# Altium PCB PCB1.PcbDoc
Units mil, origin at the board's own origin, x right, y up, seen from the top; angles counter-clockwise.
Board outline 5895.03 x 2530.03 mil, 2 copper layers (Top Layer, Bottom Layer); 10 components, 19 nets, 96 pads, 0 vias.
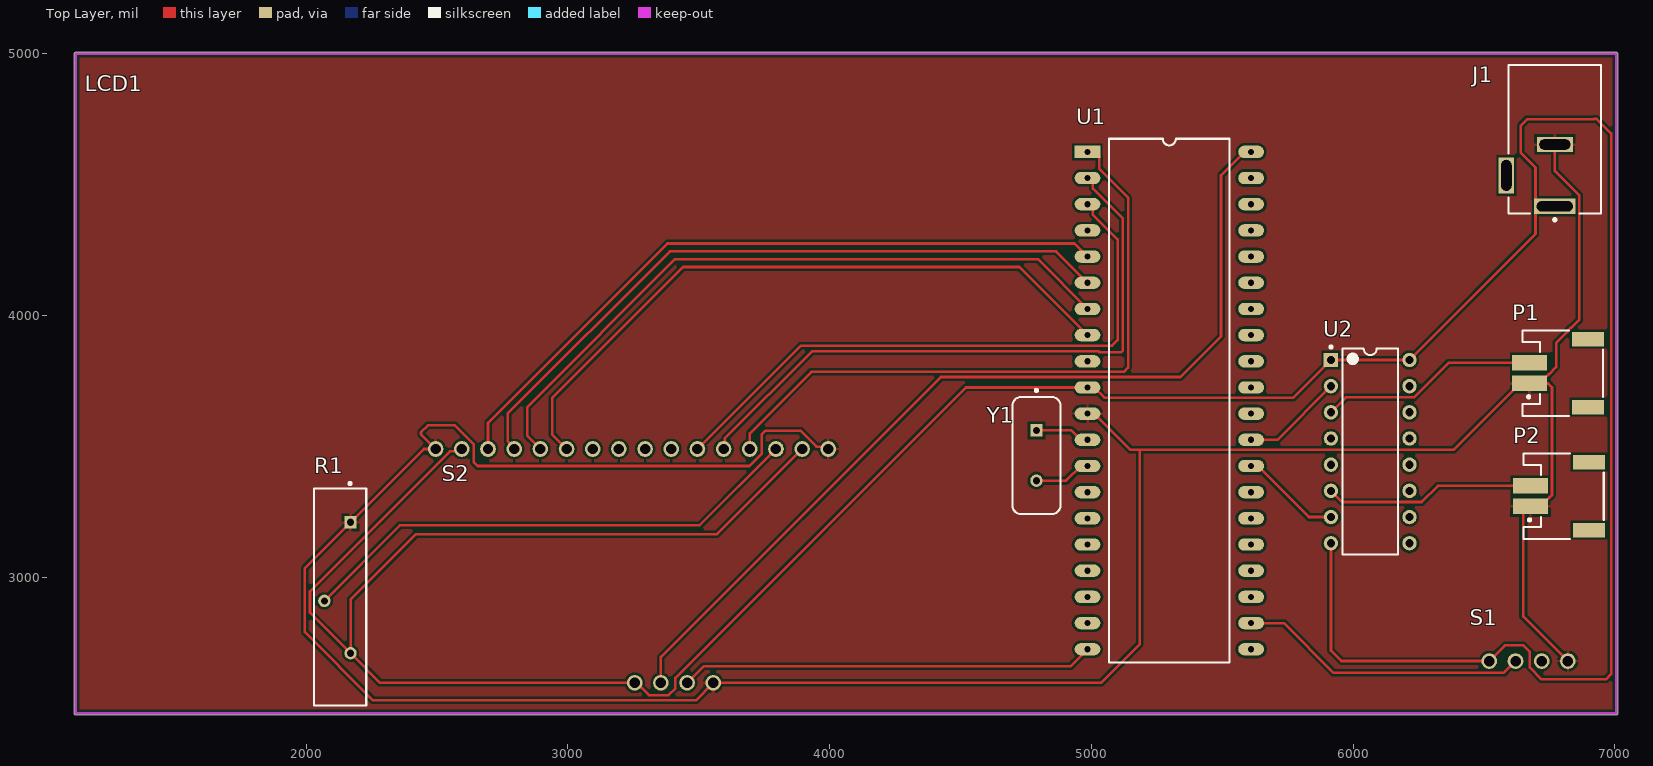
[diagram p0: Top Layer view]
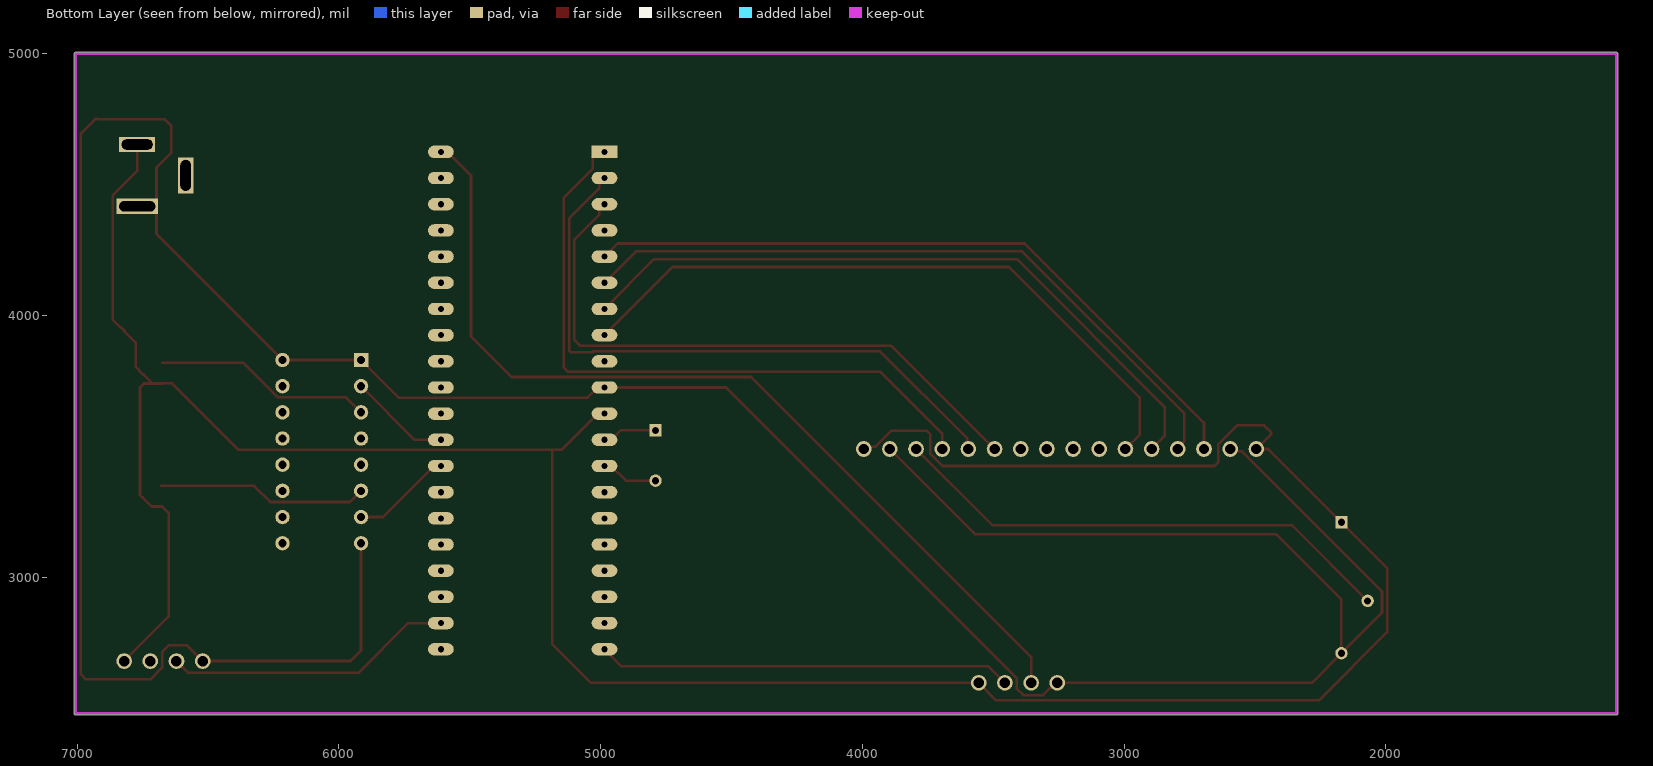
[diagram p1: Bottom Layer view, seen from below]
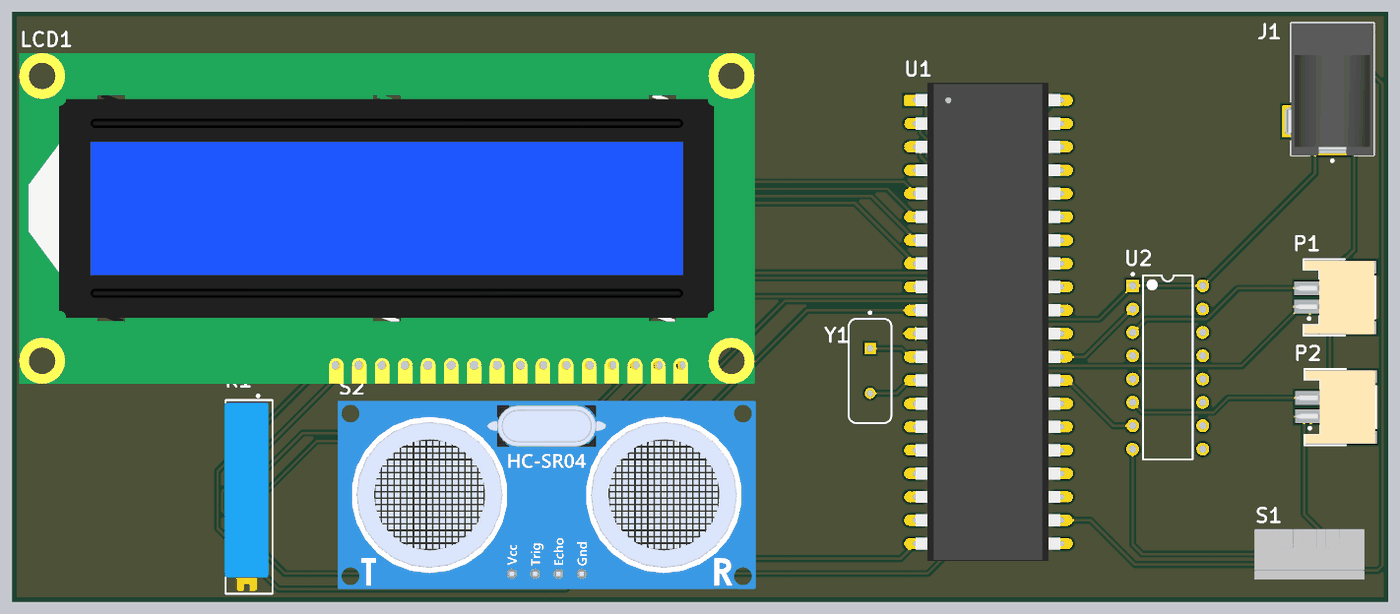
[diagram p2: 3D render of the assembled board from above, using the file's embedded part models]

## Layer stack, top to bottom
Top Solder: solder mask 0.4, Solder Resist, Dk 3.5
Top Layer: signal copper 1.4
Dielectric 1: dielectric 12.6, FR-4, Dk 4.8
Bottom Layer: signal copper 1.4
Bottom Solder: solder mask 0.4, Solder Resist, Dk 3.5

## Board outline
1114.99,2480 1114.98,5000 cw(c1120,5000) 1120,5005.02 7005,5005.02 cw(c7005,5000) 7010.02,5000 7010.02,2480 cw(c7005,2480) 7005,2474.99 1120,2474.99 cw(c1120,2480)

## Design rules (kind name [scope] priority, off if disabled: settings)
Clearance [All] p1: gap=10 ignorepadtopadclearanceinfootprint=FALSE
PolygonConnect [All] p1: connectstyle=Relief reliefconductorwidth=10 reliefentries=4 polygonreliefangle="90 Angle" airgapwidth=10
RoutingVias [All] p1: holewidth=28 width=50 viastyle="Through Hole" minholewidth=28 minwidth=50 maxholewidth=28 maxwidth=50
SolderMaskExpansion [All] p1: expansion=4 istentingtop=FALSE
Width [All] p1: maxlimit=10 minlimit=10 preferedwidth=10
30 further rules are at their usual default settings.

## Classes and differential pairs
component class Sheet2: J1 LCD1 P1 P2 R1 S1 U1 U2 Y1

## Components (designator, comment, footprint, x,y, rotation, side; value= is the part's Value field where it differs from the comment)
J1 "PJ-002A" CUI-PJ-002A_V 6770.04,4535 r90 top
LCD1 "LCD 16*2" LCD1602 2265,3450 r0 top
P1 "620102131822" 620102131822 6800,3780 r90 top
P2 "620102131822" 620102131822 6803.54,3309.92 r90 top
R1 "3006P-1-103LF" FP-3006P-MFG 2130,2925 r270 top
S1 "386" DHT11 6520,2680 r0 top
S2 "HC-SR04" HC-SR04 3255,2705 r0 top
U1 "ATMEGA16A-PU" ATmega16A 4985,4625 r0 top
U2 "L293D" STM-L293D-16 6065,3480 r0 top
Y1 "FOXSLF/080-20" FOX-FOXSLF080-20 4790,3465 r270 top

## Footprints (in the part's own frame and the unit in brackets; to place one, negate y for a bottom-side part, rotate by r counter-clockwise, add the part's x,y. Pads: shape width x height; smd on the part's side, far side on the other; paste and mask are expansions set on the pad)
620102131822 [mm] "2.00mm SMT Male Horizontal Shrouded Header, 2p"
  rect 1.5x3.4 smd: 1(-1,3.2) 2(1,3.2)
  rect 1.4x3.1 smd: MP1(-3.3,-2.45) MP2(3.3,-2.45)
  silkscreen extent -4.15,-3.9 4.15,3.9, body extent -4,-3.8 4,4.8, height 5.57
ATmega16A [mm]
  rect 2.5x1.2 hole 0.6: 1(0,0)
  oval 2.5x1.2 hole 0.6: 2(0,-2.54) 3(0,-5.08) 4(0,-7.62) 5(0,-10.16) 6(0,-12.7) 7(0,-15.24) 8(0,-17.78) 9(0,-20.32) 10(0,-22.86) 11(0,-25.4) 12(0,-27.94) 13(0,-30.48) 14(0,-33.02) 15(0,-35.56) 16(0,-38.1) 17(0,-40.64) 18(0,-43.18) 19(0,-45.72) 20(0,-48.26) 21(15.875,-48.26) 22(15.875,-45.72) 23(15.875,-43.18) 24(15.875,-40.64) 25(15.875,-38.1) 26(15.875,-35.56) 27(15.875,-33.02) 28(15.875,-30.48) 29(15.875,-27.94) 30(15.875,-25.4) 31(15.875,-22.86) 32(15.875,-20.32) 33(15.875,-17.78) 34(15.875,-15.24) 35(15.875,-12.7) 36(15.875,-10.16) 37(15.875,-7.62) 38(15.875,-5.08) 39(15.875,-2.54) 40(15.875,0)
  silkscreen extent 2.08,-49.53 13.79,1.27, body extent 0,-50.16 15.75,1.91, height 5.21
CUI-PJ-002A_V [mm] "THD, 3-Leads, Body 14.4x9mm, Height 11mm"
  rect 1.5x4 hole 1 slot 3.5 at 90 deg: 1(-3,0)
  rect 1.5x3.5 hole 1 slot 3 at 90 deg: 2(3,0)
  rect 3.5x1.5 hole 1 slot 3 at 0 deg: 3(0,4.7)
  silkscreen extent -4.42,-4.5 10.7,4.5, body extent -3.7,-4.5 10.7,4.9, height 11
DHT11 [mil]
  round 60 hole 40: 1(0,0) 2(100,0) 3(200,0) 4(300,0)
  body extent -84,-110 388,107, height 926
FOX-FOXSLF080-20 [mm] "THD, 2-Leads, Body 11.35x4.65mm"
  rect 1.2x1.2 hole 0.7: 1(-2.44,0)
  round 1.2 hole 0.7: 2(2.44,0)
  silkscreen extent -6.45,-2.32 5.68,2.32, body extent -5.67,-2.32 5.68,2.33, height 3.6
FP-3006P-MFG [mm]
  rect 1.2x1.2 hole 0.7 paste-2539.97 mask+0: 1(-7.235,1.015)
  round 1.2 hole 0.7 paste-2539.97 mask+0: 2(0.385,-1.525) 3(5.465,1.015)
  silkscreen extent -11.12,-2.54 10.54,2.54, body extent -10.64,-2.64 10.64,2.64, height 0.25
HC-SR04 [mil]
  round 60 hole 40: 1(0.28,-108.35) 2(100.28,-108.35) 3(200.28,-108.35) 4(300.28,-108.35)
  body extent -746,-175 1046,632, height 865
LCD1602 [mil]
  round 60 hole 40: 1(1730,40) 2(1630,40) 3(1530,40) 4(1430,40) 5(1330,40) 6(1230,40) 7(1130,40) 8(1030,40) 9(930,40) 10(830,40) 11(730,40) 12(630,40) 13(530,40) 14(430,40) 15(330,40) 16(230,40)
  body extent -1120,-40 2030,1377, height 343
STM-L293D-16 [mm] "DIP, 16-Leads, Body 20x6.85mm, Pitch 2.54mm"
  rect 1.4x1.4 hole 0.8: 1(-3.81,8.89)
  round 1.4 hole 0.8: 2(-3.81,6.35) 3(-3.81,3.81) 4(-3.81,1.27) 5(-3.81,-1.27) 6(-3.81,-3.81) 7(-3.81,-6.35) 8(-3.81,-8.89) 9(3.81,-8.89) 10(3.81,-6.35) 11(3.81,-3.81) 12(3.81,-1.27) 13(3.81,1.27) 14(3.81,3.81) 15(3.81,6.35) 16(3.81,8.89)
  silkscreen extent -3.93,-10 2.7,10.26, body extent -3.93,-10 3.93,10, height 5.1

## Part data
J1: library part CMP-2000-06895-2, "Through Hole Right Angle DC Power Jack, 2.5 A, 2 mm Center Pin, 3 Position, -25 to 85 degC, RoHS, Bulk", Current Rating=2.5A, Flammability Rating=UL94V-0, Insulation Resistance=50MOhms, Manufacturer=CUIInc., Operating Temperature Range=-25Cto+85C, Package Description="3-Pin Through Hole Device, Body 14.4 x 9 mm, Height 11 mm", Voltage Rating=24V, Brand=CUI, Connector Type=DCPowerJack, Contact Gender=Male, Contact Material=Copper, Contact Plating=Nickel, Datasheet URL=http://www.cui.com/product/resource/pj-002a.pdf, Datasheet Version="Rev. 1.03, 04/2016", Factory Pack Quantity=500, Housing Material=PolybutyleneTerephthalate(PBT), Inside Contact Diameter=2mm, Manufacturer Part Number=PJ-002A, Manufacturer URL=http://www.cui.com/, Mounting Angle=Right, Mounting Style=ThroughHole, Mounting Technology=ThroughHole, Outside Contact Diameter=6.5mm, Package Reference=PJ-002A, Product=Jacks, Product Category=DCPowerConnectors, RoHS=True, Termination Style=ThroughHole
P1 P2: library part CMP-1502-00669-1, "Male Shrouded Header WR-WTB, SMT, Right Angled, pitch 2 mm, 1 x 2 position", Contact Resistance=20mOhm, Manufacturer="Wurth Elektronik", Operating Temperature=-25to85degC, Working Voltage=100VAC, Datasheet URL=https://katalog.we-online.de/em/datasheet/6201xx131822.pdf, Gender=Male, Manufacturer Part Number=620102131822, Manufacturer URL=http://www.we-online.de, Mounting Technology=SMT, Orientation=RightAngled, Package Reference=620102131822, Packaging=TapeandReel, Part Number=620102131822, Pitch=2mm, Position=1x2, Publisher=WurthElektronik
R1: library part CMP-07234-000047-1, "TRIMMER 10KOHM 0.75W PC PIN SIDE", Color=Blue, Insulation Resistance=1GR, Manufacturer=Bourns, Manufacturer Series=3006, Max Operating Temperature=125°C, Max Power Dissipation=750mW, Min Operating Temperature=-55°C, Package Quantity=100, Resistance=10kR, Resistance Law=Linear, Resistance Tolerance=10%, Resistor Type=Cermet, Temperature Coefficient=100ppm/°C, Actuator Orientation=Horizontal, Actuator Type=SCREW, Depth=4.83mm, Height=6.35mm, Lead Free="Lead Free", Length=20.57mm, Manufacturer Part Number=3006P-1-103LF, Military Standard=Not, Mount=Panel, Number of Pins=3, Number of Terminals/Pins=3, Number of Turns=15, Packaging=Rail/Tube, Pin Diameter=0.6mm, Pitch=2.5mm, Power Rating=750mW, Radiation Hardening=No, REACH SVHC="No SVHC", RoHS Compliant=Yes, Series=3006, Taper=Linear, Technology=CERMET, Terminal Finish=Tin, Termination=Pin, Thickness=5.59mm, Tolerance=10%, Type=Potentiometer, Weight=0.04oz, Width=4.83mm
S1: "SENSOR HUMID/TEMP 5V DTL 5% MOD", Manufacturer="Adafruit Industries", Max Operating Temperature=50°C, Min Operating Temperature=0°C, Accuracy=5%, Category=Sensors, ComponentLink1Description=https://media.digikey.com/pdf/Data%20Sheets/Adafruit%20PDFs/DHT11_ProdManual.pdf?src-supplier=Digi-Key, ComponentLink1URL=https://media.digikey.com/pdf/Data%20Sheets/Adafruit%20PDFs/DHT11_ProdManual.pdf?src-supplier=Digi-Key, Manufacturer Part Number=386, Mount="Chassis Mount", Output Type=Digital, Pricing 1="1=5.00000 (USD)", Response Time=1s, RoHS=Yes, Sensor Type=Temperature, Series=-, Stock 1=15, Supplier 1="Arrow Electronics"
S2: "Ultrasonic Sensor Module, Rectangular, 20-4000 mm, 5 V, 15 mA, Arduino Compatible", Manufacturer=OSEPP, Category=Sensors, ComponentLink1Description=http://www.alliedelec.com/m/d/24ef524bf2e055bb41c3e7d4403161f4.pdf?src-supplier=Allied+Electronics, ComponentLink1URL=http://www.alliedelec.com/m/d/24ef524bf2e055bb41c3e7d4403161f4.pdf?src-supplier=Allied+Electronics, Manufacturer Part Number=HC-SR04, Pricing 1="1=6.55000, 10=6.55000, 50=6.55000, 100=6.55000, 1000=6.55000, 10000=6.55000 (USD)", RoHS=Yes, Stock 1=121, Supplier 1=Mouser
U1: "8-bit AVR MCU, 16 KB, 1024 Bytes, 16 MHz, 2.7 to 5.5V, PDIP-40, RoHS", Case/Package=PDIP, Frequency=16MHz, Manufacturer="Microchip / Atmel", Max Operating Temperature=85°C, Max Supply Voltage=5.5V, Min Operating Temperature=-40°C, Min Supply Voltage=2.7V, Package Quantity=10, Category=Microcontrollers, ComponentLink1Description=https://datasheet.ciiva.com/26860/getdatasheetpartid-464499-26860340.pdf?src-supplier=Verical, ComponentLink1URL=https://datasheet.ciiva.com/26860/getdatasheetpartid-464499-26860340.pdf?src-supplier=Verical, ComponentLink2Description=https://datasheet.ciiva.com/14633/0900766b80db4e44-14633395.pdf?src-supplier=Allied+Electronics, ComponentLink2URL=https://datasheet.ciiva.com/14633/0900766b80db4e44-14633395.pdf?src-supplier=Allied+Electronics, ComponentLink3Description=https://datasheet.ciiva.com/1157/466147-1157513.pdf?src-supplier=Element14, ComponentLink3URL=https://datasheet.ciiva.com/1157/466147-1157513.pdf?src-supplier=Element14, Contact Plating=Tin,Matte, Core Architecture=AVR, Data Bus Width=8b, Height=4.445mm, Interface=I2C,SPI,UART,USART,2-Wire, Lead Free="Lead Free", Length=52.58mm, Manufacturer Part Number=ATMEGA16A-PU, Max Frequency=16MHz, Memory Size=16KB, Memory Type=FLASH, Mount="Through Hole", Number of ADC Channels=8, Number of I2C Channels=1, Number of I/Os=32, Number of Pins=40, Number of Programmable I/O=32, Number of PWM Channels=4, Number of SPI Channels=1, Number of Timers/Counters=3, Oscillator Type=Internal, Packaging=Rail/Tube, Peripherals="Brown-out Detect/Reset,POR,PWM,WDT", Radiation Hardening=No, RAM Size=1KB, REACH SVHC="No SVHC", RoHS=Yes, Series="AVR® ATmega", Supplier 1=Newark, Watchdog Timer=Yes, Width=13.97mm
U2: "Push-Pull Four Channel Driver with Diode, 4.5 to 36 V, -40 to 150 degC, 16-Pin PDIP, RoHS, Tube", Current - Output / Channel=600mA, Current - Peak Output=1.2A, Manufacturer=STMicroelectronics, On-State Resistance=-, Operating Temperature=-40°C~150°C, Package / Case="16-DIP(0.300\",7.62mm)", Package Description="16-Pin Thru-Hole Dual-In-Line, Body 20 x 6.85 mm, Pitch 2.54 mm", Package Reference=DIP-16, Standard Package=25, Supplier Device Package=16-PowerDIP, Voltage - Supply=4.5V~36V, Category=IntegratedCircuits(ICs), Datasheet URL=http://www.st.com/st-web-ui/static/active/en/resource/technical/document/datasheet/CD00000059.pdf, Datasheet Version=07/2003, Dynamic Catalog=HalfBridge, Family=PMIC-MOSFET,BridgeDrivers-InternalSwitch, Input Type=Non-Inverting, Manufacturer Part Number=L293D, Manufacturer URL=http://www.st.com/, Mounting Technology=ThroughHole, Mounting Type=ThroughHole, Number of Outputs=4, Other Names=497-2936-5, Other Related Documents=L293DViewAllSpecifications, Packaging=Tube, PartNumber=L293D, Series=-, Type=HalfBridge
Y1: library part CMP-1749-00002-1, "Resistance Weld Thru-Hole Crystal, 8 MHz, -20 to 70 degC, 2-Pin THD, RoHS, Bulk", Case\Package=TO-263-3, Dropout Voltage="2 V", Manufacturer="Fox Electronics", Max Input Voltage="35 V", Max Operating Temperature="125 degC", Max Ouput Current="1 A", Min Input Voltage="7 V", Min Operating Temperature="0 degC", Nominal Output Voltage="5 V", Package Quantity=50, ComponentLink1Description="Manufacturer URL", ComponentLink1URL=http://www.foxonline.com/, ComponentLink2Description=Datasheet, ComponentLink2URL=http://download.siliconexpert.com/pdfs/2015/4/5/6/5/7/200/fox_/manual/35607121449963728hc49slf.pdf, DatasheetVersion=Mar-15, Height="30.02 mm", Length="10.24 mm", Manufacturer Part Number=FOXSLF/080-20, Mount="Surface Mount", Output Current="1 A", Output Voltage="5 V", Outputs=1, PackageDescription="2-Pin Through Hole Device, Body 11.35 x 4.65 mm", PackageReference=FOXSLF080-20, Packaging=Rail/Tube, Pins=3, Radiation Hardening=No, REACH SVHC="No SVHC", RoHSCompliant=true, Width="9.35 mm"

## Nets (pads, with @x,y where several pads share a name; then routed paths per layer and width w, separated by ;. In a path a pad name is that pad's centre, name@x,y a point inside that pad or via, vN(x,y) a via of type N, cw(c..) or ccw(c..) an arc to the next point about the centre after c; other vN are vias at no path point)
GND: J1.2 LCD1.1 LCD1.16 P1.1 P2.1 R1.1 S1.4 S2.4 U1.11 | length 11131.2
  Top Layer w10: LCD1.1 3986.36,3498.64 3950,3498.64 3888.64,3560 3755,3560 3740,3545 3740,3471.36 3693.64,3425 2655,3425 2640,3440 2640,3508.64 2568.64,3580 2465,3580 2439.14,3554.14 2439.14,3545.86 LCD1.16 2494.88,3489.88 2450,3489.88 R1.1 1995,3034.88 1995,2790.86 2255.86,2530 3488.63,2530 S2.4 5036.65,2596.65 5184.79,2744.79 5184.79,3486.38 ; U1.11 5010.59,3625 5149.21,3486.38 5184.79,3486.38 ; J1.2 6770.04,4551.74 6863.78,4458 6863.78,3983.78 6832.48,3952.48 6829.22,3952.48 6820.43,3943.69 6820.43,3940.43 6775,3895 6775,3802.68 6747.16,3774.84 6745.63,3774.84 6711.42,3740.63 P1.1 ; S1.4 6650,2850 6650,3246.02 6674.53,3270.55 P2.1 6714.96,3270.55 6749.17,3304.76 6750.7,3304.76 6759.49,3313.55 6759.49,3725.51 6745,3740 6674.65,3740 P1.1 ; 5184.79,3486.38 6382.36,3486.38 6636.61,3740.63 P1.1
NetJ1_1: J1.1 LCD1.2 LCD1.15 R1.3 S1.1 S2.1 U1.10 U2.1 U2.8 U2.16 | length 13186.2
  Top Layer w10: LCD1.15 2586.36,3481.36 2550,3481.36 2015,2946.36 2015,2864.8 R1.3 ; LCD1.2 3570,3165 2420,3165 2169.96,2914.96 R1.3 ; U2.8 5915,2720 5955,2680 S1.1 6580,2740 6650,2740 6675,2715 6675,2655 6720,2610 6965,2610 6985,2630 6985,4695 6929.14,4750.86 6920.86,4750.86 6920,4750 6665,4750 6640,4725 6640,4620.93 6696.3,4564.63 6696.3,4441.42 6720.83,4416.89 J1.1 ; J1.1@6696.3,4392.36 6696.3,4311.3 U2.16 U2.1 5771.38,3686.38 5049.21,3686.38 5010.59,3725 U1.10 4519.99,3725 3410.28,2615.29 3410.28,2575.28 3385,2550 3310,2550 3263.35,2596.65 S2.1 2283.15,2596.65 R1.3
NetLCD1_3: LCD1.3 R1.2 | length 1965.3
  Top Layer w10: R1.2 2358.82,3198.7 3503.7,3198.7 LCD1.3
NetLCD1_4: LCD1.4 U1.1 | length 2512.2
  Top Layer w10: LCD1.4 3695,3550 3930,3785 5124.14,3785 5140,3800.86 5140,4450.21 5029.21,4561 5029.21,4606.38 5010.59,4625 U1.1
NetLCD1_5: LCD1.5 U1.2 | length 2421.2
  Top Layer w10: LCD1.5 3599.14,3494.14 3599.14,3529.14 3933.62,3863.62 5026.59,3863.62 5030.21,3860 5114.14,3860 5120,3865.86 5120,4370.21 5005.59,4484.62 5005.59,4507.8 4988.39,4525 U1.2
NetLCD1_6: LCD1.6 U1.3 | length 2346
  Top Layer w10: LCD1.6 3890,3885 5079.14,3885 5100,3905.86 5100,4290.21 5005.59,4384.62 5005.59,4407.8 4988.39,4425 U1.3
NetLCD1_11: LCD1.11 U1.8 | length 2577.6
  Top Layer w10: LCD1.11 2940,3545 2940,3685 3440,4185 4725,4185 U1.8
NetLCD1_12: LCD1.12 U1.7 | length 2633.4
  Top Layer w10: LCD1.12 2845,3540 2845,3650 3410,4215 4795,4215 U1.7
NetLCD1_13: LCD1.13 U1.6 | length 2666.9
  Top Layer w10: LCD1.13 2795,3495.36 2770,3520.36 2770,3625 3390,4245 4865,4245 U1.6
NetLCD1_14: LCD1.14 U1.5 | length 2694.4
  Top Layer w10: LCD1.14 2695,3590 3380,4275 4935,4275 U1.5
NetP1_2: P1.2 U2.3 | length 837.5
  Top Layer w10: U2.3 5972.44,3687.44 6232.63,3687.44 6364.56,3819.37 P1.2
NetP2_2: P2.2 U2.6 | length 805.8
  Top Layer w10: U2.6 5957.56,3287.44 6261.77,3287.44 6323.62,3349.29 P2.2
NetS1_2: S1.2 U1.22 | length 1107.3
  Top Layer w10: U1.22 5735,2825 5925,2635 6575,2635 S1.2
NetS2_3: S2.3 U1.20 | length 1582.9
  Top Layer w10: S2.3 3518.63,2660 4920,2660 U1.20
NetU1_12: U1.12 Y1.1 | length 209.9
  Top Layer w10: Y1.1 4923.35,3561.06 4959.41,3525 U1.12
NetU1_13: U1.13 Y1.2 | length 218.2
  Top Layer w10: Y1.2 4903.35,3368.94 4959.41,3425 U1.13
NetU1_28: U1.28 U2.7 | length 385.8
  Top Layer w10: U1.28 5635.59,3425 5830.59,3230 U2.7
NetU1_29: U1.29 U2.2 | length 389.9
  Top Layer w10: U1.29 5710,3525 U2.2
Trig: S2.2 U1.40 | length 3513.3
  Top Layer w10: S2.2 3355.28,2695.28 4425,3765 5340,3765 5495,3920 5495,4535.59 5584.41,4625 U1.40
pads on no net: J1.3 LCD1.7 LCD1.8 LCD1.9 LCD1.10 P1.MP1 P1.MP2 P2.MP1 P2.MP2 S1.3 U1.4 U1.9 U1.14 U1.15 U1.16 U1.17 U1.18 U1.19 U1.21 U1.23 U1.24 U1.25 U1.26 U1.27 U1.30 U1.31 U1.32 U1.33 U1.34 U1.35 U1.36 U1.37 U1.38 U1.39 U2.4 U2.5 U2.9 U2.10 U2.11 U2.12 U2.13 U2.14 U2.15

## Polygon pours and split planes (outlines as drawn)
GND on Top Layer "NONET_L-01_P-001" (solid, pour order 0): 1130,4995 1135,4990 6995,4990 6995,2485 1125,2485 1125,4995

## Keep-outs
Keep-Out Layer:
  lines w10: 1120,2480 1120,5000 7005,5000 7005,2480 1120,2480